# Altium PCB addl_faceplate_right.PcbDoc
Units mm, origin at the board's own origin, x right, y up, seen from the top; angles counter-clockwise.
Board outline 60 x 22.7 mm, 2 copper layers (Top Layer, Bottom Layer); 1 components, 0 nets, 0 pads, 0 vias.
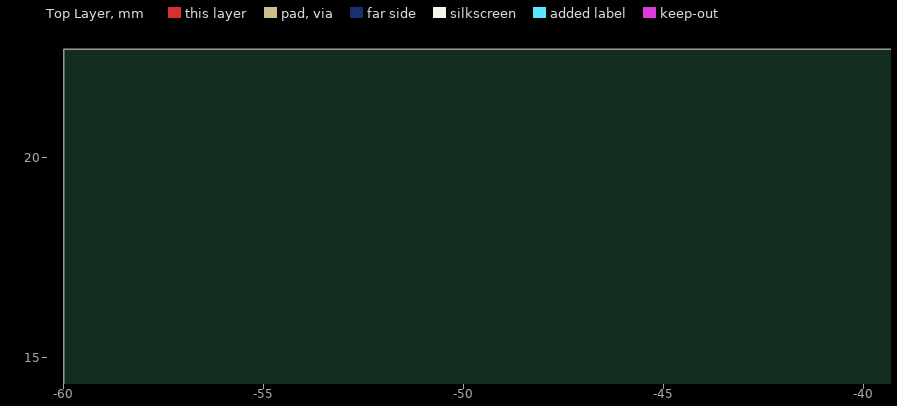
[diagram p0: Top Layer view]
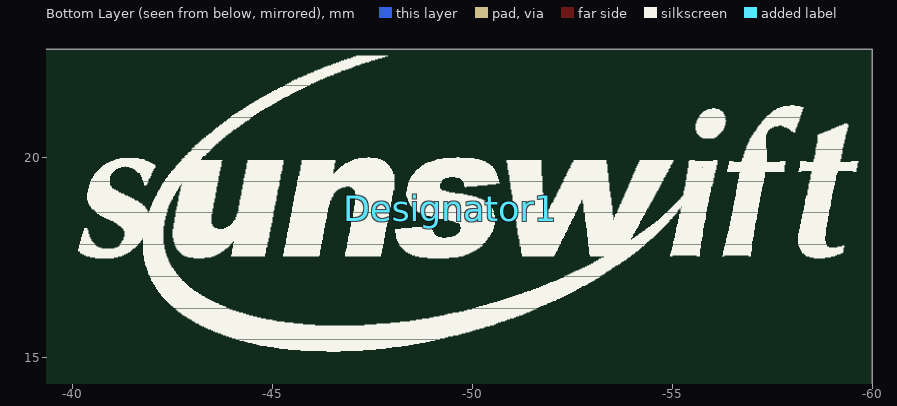
[diagram p1: Bottom Layer view, seen from below]

## Layer stack, top to bottom
Top Layer: signal copper 0.0356
Dielectric: dielectric 0.32, FR-4, Dk 4.8
Bottom Layer: signal copper 0.0356

## Board outline
-59.993,0.002 -59.993,22.702 0.002,22.702 0.007,0.002

## Design rules (kind name [scope] priority, off if disabled: settings)
Clearance [All] p1: gap=0.254
FabricationTestPointUsage TestPointUsage [All] p1: valid=0 allowmultiple=FALSE
FabricationTestpoint Testpoint [(IsPad And (OnTopLayer Or OnBottomLayer))] p1: side=3 testpointundercomponent=TRUE minsize=1.016 maxsize=2.54 preferedsize=1.524 minholesize=0 maxholesize=1.016 preferedholesize=0.813 testpointgrid=0.025 allowsidetop=TRUE allowsidebottom=TRUE usegrid=TRUE gridtolerance=0
PolygonConnect [All] p1: connectstyle=Relief reliefconductorwidth=0.254 reliefentries=4 polygonreliefangle="90 Angle"
RoutingVias [All] p1: holewidth=0.711 width=1.27 viastyle="Through Hole" minholewidth=0.711 minwidth=1.27 maxholewidth=0.711 maxwidth=1.27
SilkscreenOverComponentPads [All] p1: minsilkscreentomaskgap=0.254
SolderMaskExpansion [All] p1: expansion=0.102
Width [All] p1: maxlimit=0.254 minlimit=0.254 preferedwidth=0.254
25 further rules are at their usual default settings.

## Components (designator, comment, footprint, x,y, rotation, side; value= is the part's Value field where it differs from the comment)
Designator1 "Comment" SUNSWIFTLOGO -49.454,18.72 r180 bottom

## Footprints (in the part's own frame and the unit in brackets; to place one, negate y for a bottom-side part, rotate by r counter-clockwise, add the part's x,y. Pads: shape width x height; smd on the part's side, far side on the other; paste and mask are expansions set on the pad)
SUNSWIFTLOGO [mm] "Sunswift Logo"
  silkscreen extent -9.32,-3.58 10.19,3.81

## Nets (pads, with @x,y where several pads share a name; then routed paths per layer and width w, separated by ;. In a path a pad name is that pad's centre, name@x,y a point inside that pad or via, vN(x,y) a via of type N, cw(c..) or ccw(c..) an arc to the next point about the centre after c; other vN are vias at no path point)

## Silkscreen, mask and mechanical layers (free items; w line width, h text height)
Top Overlay:
  text "ANDROID" at -8.585,17.069 h1
  text "USB" at -6.858,15.545 h1
  text "DEBUG" at -38.913,14.783 h1
  text "PC CONN" at -18.034,13.335 h1
  text "LCD        TEST" at -49.987,13.081 h1
  text "USB-SER" at -18.059,11.328 h1
Bottom Overlay:
  rectangle: -58.293,4.852 -1.693,6.452
  text "DRIVER DISPLAY '13" at -1.803,3.251 h1
Mechanical 1:
  lines w0.25: -3.658,6.198 -7.595,6.198 -7.595,14.783 -3.404,14.783 -3.404,6.401 ; -50.089,6.274 -35.128,6.274 -35.128,12.649 -50.089,12.649 -50.089,6.274 ; -18.872,6.223 -9.957,6.223 -9.957,10.897 -18.872,10.897 -18.872,6.223
  lines w0.254: -59.993,0.002 0.007,0.002 0.007,22.702 -26.983,22.702 -59.993,22.702 -59.993,0.002